# Altium PCB PCB1.PcbDoc
Units mil, origin at the board's own origin, x right, y up, seen from the top; angles counter-clockwise.
Board outline 1968.5 x 1968.5 mil, 2 copper layers (Top Layer, Bottom Layer); 28 components, 22 nets, 118 pads, 19 vias.
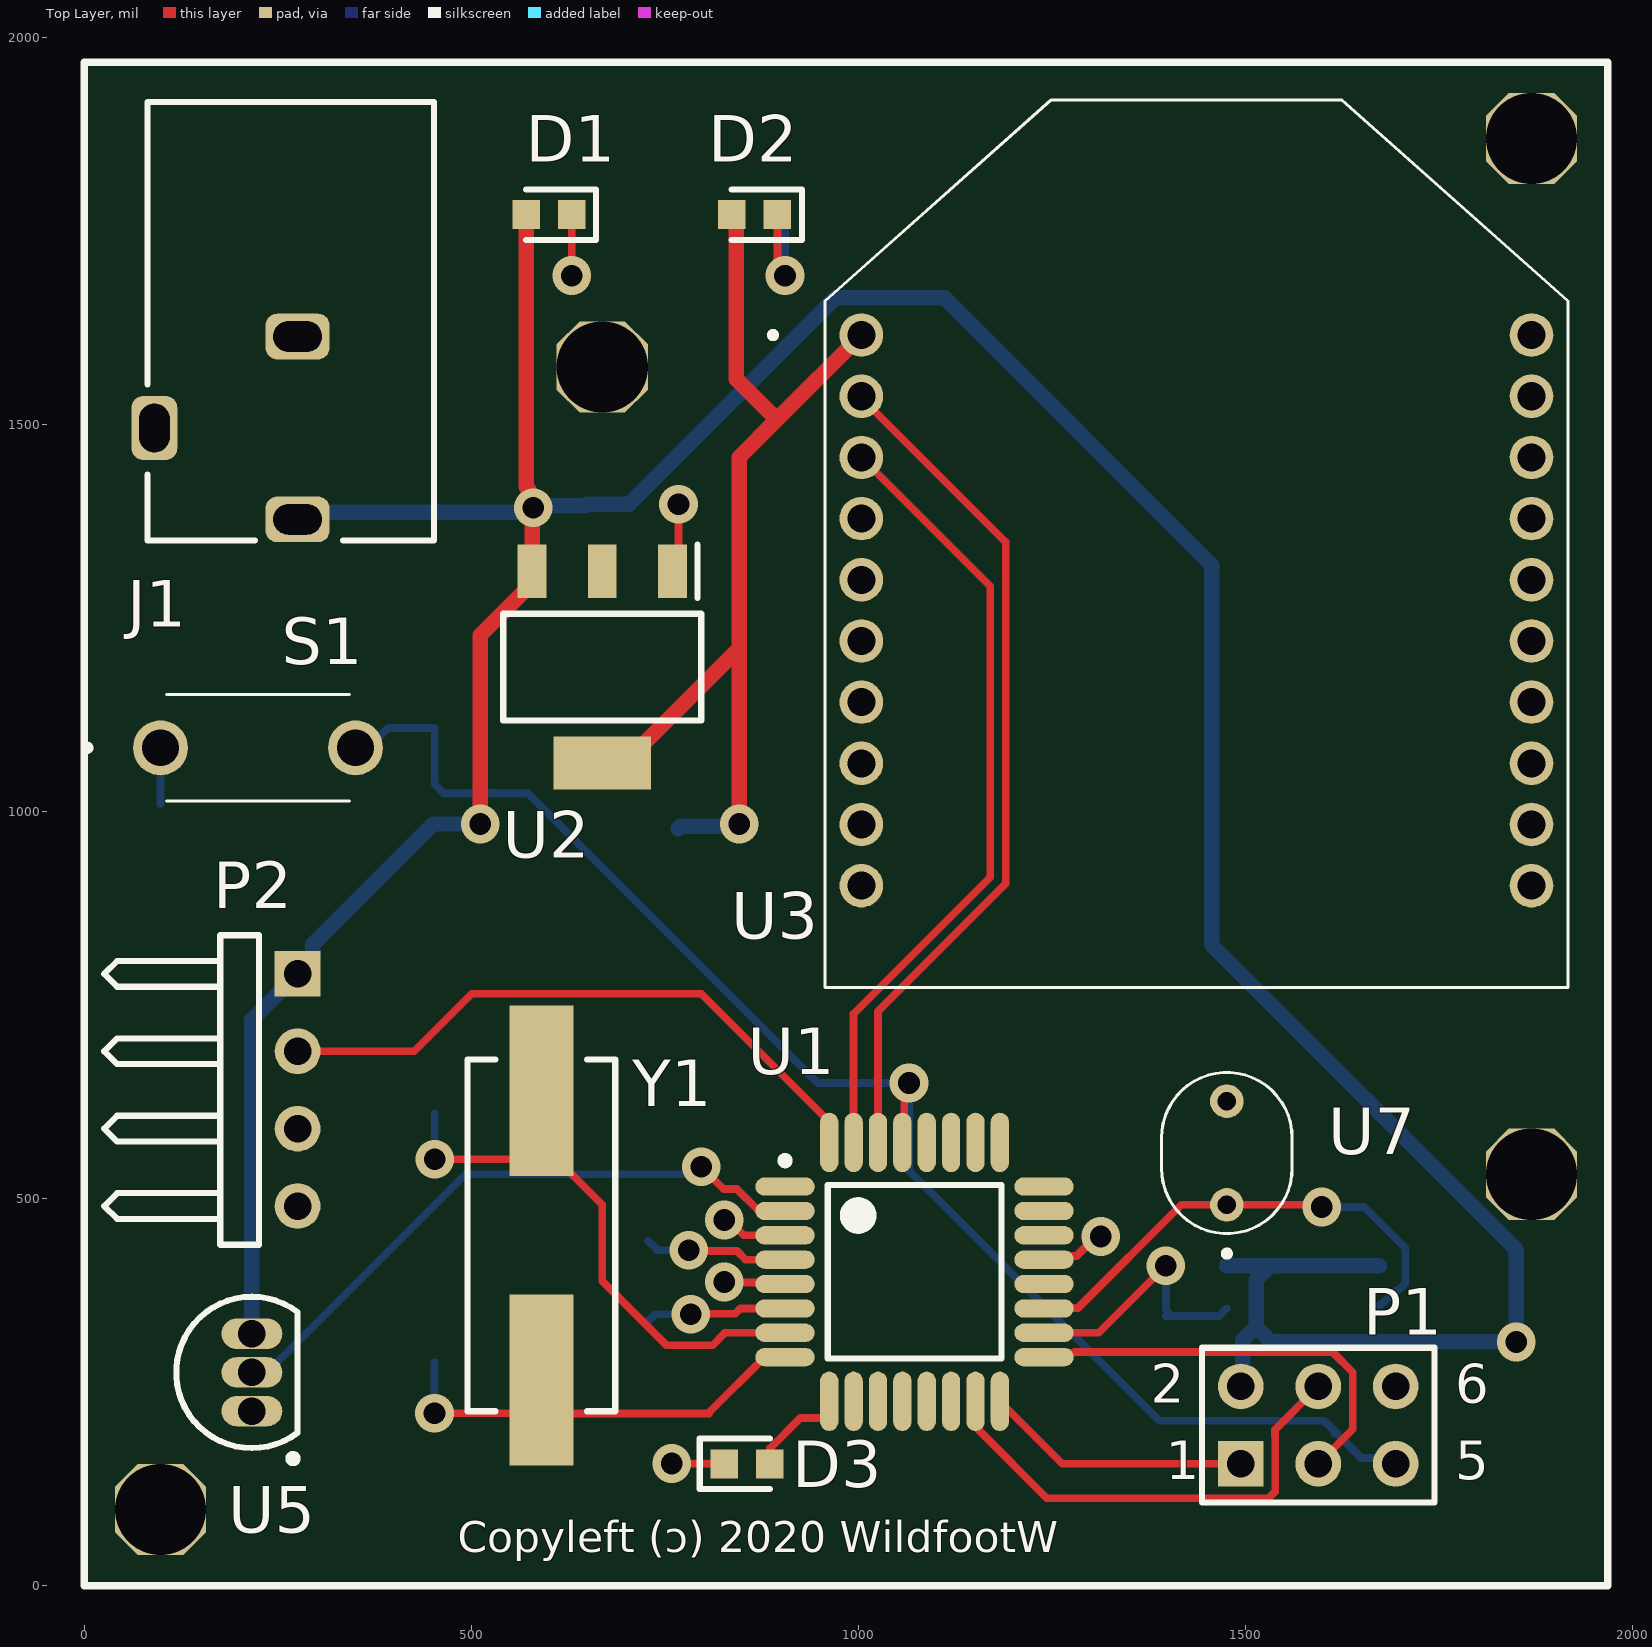
[diagram p0: Top Layer view]
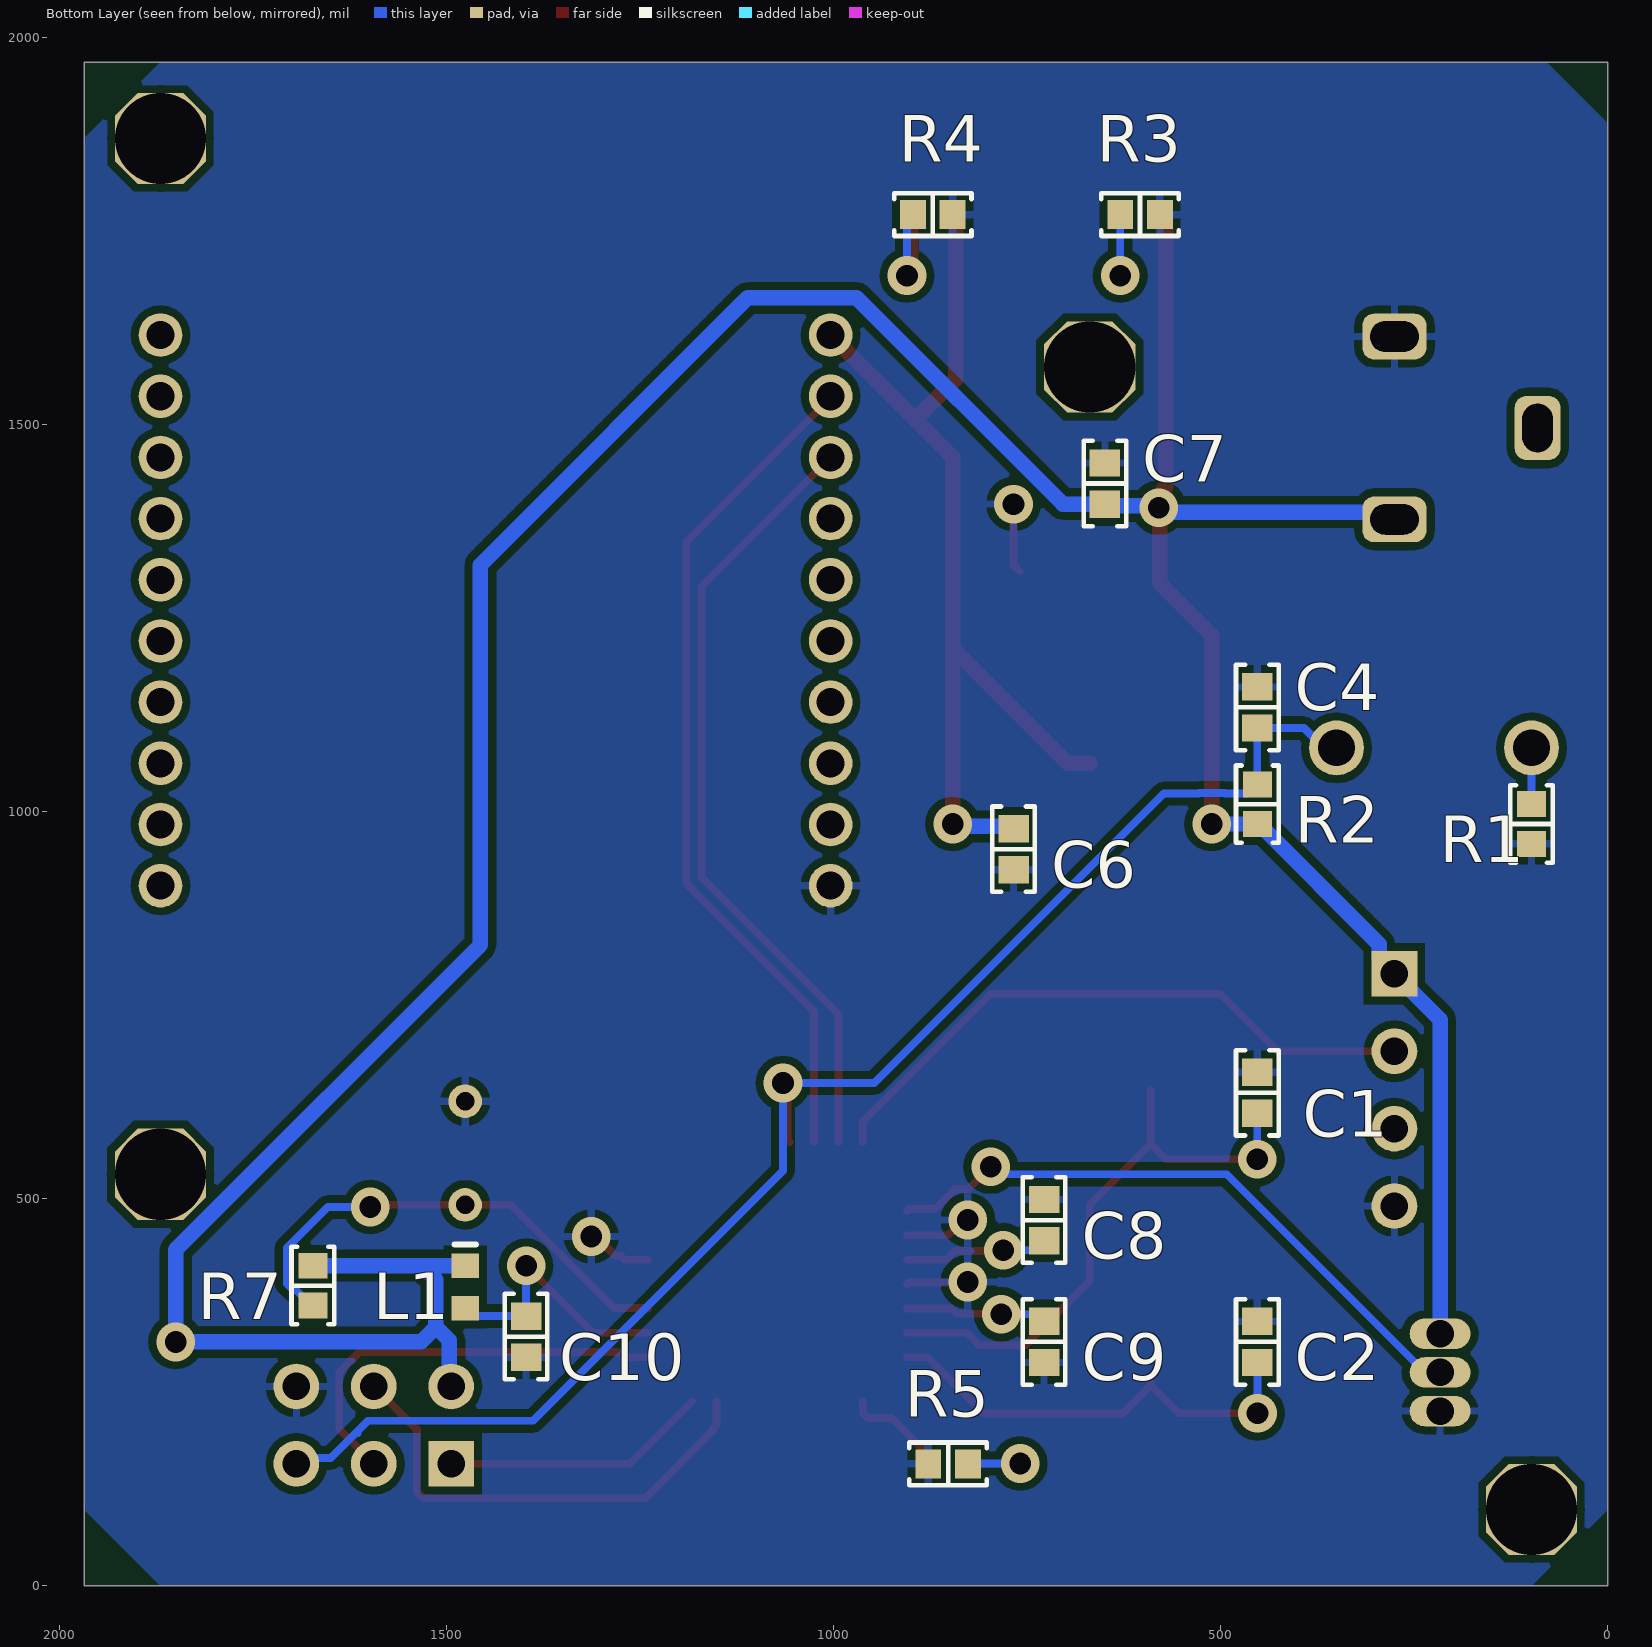
[diagram p1: Bottom Layer view, seen from below]
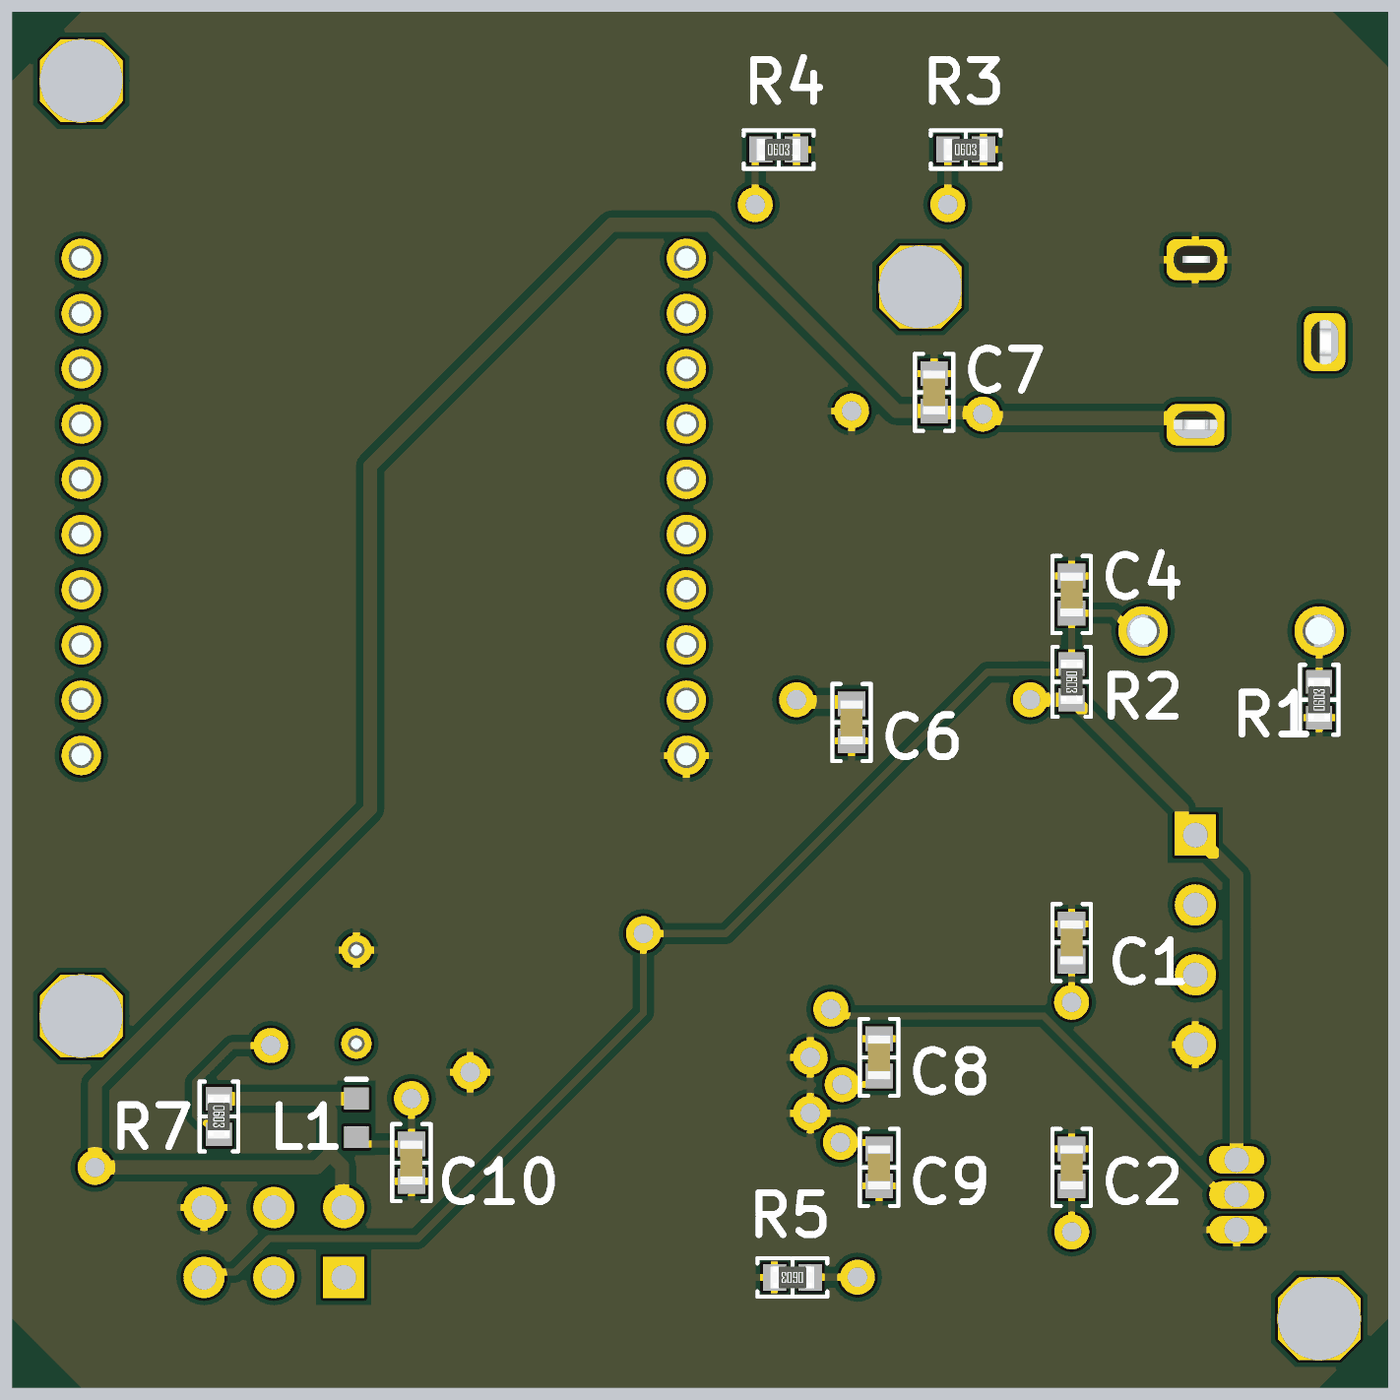
[diagram p2: 3D render of the assembled board from below, using the file's embedded part models]

## Layer stack, top to bottom
Top Solder: solder mask 0.4, Solder Resist, Dk 3.5
Top Layer: signal copper 1.4
Dielectric 1: dielectric 12.6, FR-4, Dk 4.8
Bottom Layer: signal copper 1.4
Bottom Solder: solder mask 0.4, Solder Resist, Dk 3.5

## Board outline
0,0 0,1968.5 1968.5,1968.5 1968.5,0

## Design rules (kind name [scope] priority, off if disabled: settings)
Clearance "Clearance 5V" [All] p1: gap=10 ignorepadtopadclearanceinfootprint=FALSE except(0: Arc-Hole Track-Hole SMDPad-Hole THPad-Hole Via-Hole Fill-Hole Poly-Hole Region-Hole Text-Hole; 3.94: SMDPad-SMDPad)
Clearance [All] p2: gap=10 ignorepadtopadclearanceinfootprint=FALSE except(0: Arc-Hole Track-Hole SMDPad-Hole THPad-Hole Via-Hole Fill-Hole Poly-Hole Region-Hole Text-Hole)
PolygonConnect [All] p1: connectstyle=Relief reliefconductorwidth=10 reliefentries=4 polygonreliefangle="90 Angle" airgapwidth=10
RoutingVias [All] p1: holewidth=28 width=50 viastyle="Through Hole" minholewidth=28 minwidth=50 maxholewidth=28 maxwidth=50
SolderMaskExpansion [All] p1: expansion=4 istentingtop=FALSE
Width Width_5V [InNet('VCC')] p1: maxlimit=20 minlimit=20 preferedwidth=20 minimp=50.000000 maximp=50.000000 favimp=50.000000
Width Width_3.3V [InNet('+3.3')] p2: maxlimit=20 minlimit=20 preferedwidth=20 minimp=50.000000 maximp=50.000000 favimp=50.000000
Width [All] p3: maxlimit=10 minlimit=10 preferedwidth=10
30 further rules are at their usual default settings.

## Components (designator, comment, footprint, x,y, rotation, side; value= is the part's Value field where it differs from the comment)
C1 "20pF" "CAP 0603_1608" 452.76,636.81 r90 bottom
C2 "20pF" "CAP 0603_1608" 452.76,314.96 r90 bottom
C4 "0.1µF" "CAP 0603_1608" 452.76,1134.84 r270 bottom
C6 "10µF" "CAP 0603_1608" 767.72,951.77 r90 bottom
C7 "10µF" "CAP 0603_1608" 649.61,1424.21 r270 bottom
C8 "100pF" "CAP 0603_1608" 728.35,472.44 r270 bottom
C9 "100pF" "CAP 0603_1608" 728.35,314.96 r90 bottom
C10 "0.1µF" "CAP 0603_1608" 1397.64,321.85 r90 bottom
D1 "LTST-C190GKT" LEDC1608X90N 600.39,1771.65 r180 top
D2 "LTST-C190GKT" LEDC1608X90N 866.14,1771.65 r180 top
D3 "LTST-C190GKT" LEDC1608X90N 856.3,157.48 r0 top
J1 "PJ-102AH" "CUI PJ-102AH" 275.59,1633.86 r0 top
L1 "10μH" INDC1608L 1476.38,385.83 r270 bottom
P1 "Header 3X2" HDR2X3 1494.49,157.48 r0 top
P2 "DHT22" HDR1X4H 275.59,790.55 r270 top
R1 "330 Ohms" "RES 0603_1608" 98.43,984.25 r90 bottom
R2 "4.7 kOhms" "RES 0603_1608" 452.76,1009.84 r270 bottom
R3 "500 Ohms" "RES 0603_1608" 604.33,1771.65 r180 bottom
R4 "330 Ohms" "RES 0603_1608" 872.05,1771.65 r180 bottom
R5 "500 Ohms" "RES 0603_1608" 852.36,157.48 r0 bottom
R7 "10 kOhms" "RES 0603_1608" 1673.23,387.8 r270 bottom
S1 "PTS636_SK43_LFS" PTS636SK43LFS 98.43,1082.68 r0 top
U1 "ATmega328P-AU" 32A_M 1072.83,405.51 r0 top
U2 "LM1117IMPX3.3_NOPB" SOT230P700X180-4N 669.29,1187.01 r270 top
U3 "XB24CZ7UITB003" XB24CZ7UITB003 1004.09,1616.06 r180 top
U5 "DS18B20+" Q3+1 216.54,275.59 r0 top
U7 "PDV-P8103" PDVP8103 1476.38,492.13 r180 top
Y1 "16MHz" "ABRACON ABLS" 590.55,452.76 r270 top

## Footprints (in the part's own frame and the unit in brackets; to place one, negate y for a bottom-side part, rotate by r counter-clockwise, add the part's x,y. Pads: shape width x height; smd on the part's side, far side on the other; paste and mask are expansions set on the pad)
32A_M [mm] "Thin QFP, 32-Leads, Body 7x7mm, Pitch 0.8mm, IPC Low Density"
  oval 1.95x0.6 smd: 1(-4.25,2.8) 2(-4.25,2) 3(-4.25,1.2) 4(-4.25,0.4) 5(-4.25,-0.4) 6(-4.25,-1.2) 7(-4.25,-2) 8(-4.25,-2.8) 17(4.25,-2.8) 18(4.25,-2) 19(4.25,-1.2) 20(4.25,-0.4) 21(4.25,0.4) 22(4.25,1.2) 23(4.25,2) 24(4.25,2.8)
  oval 0.6x1.95 smd: 9(-2.8,-4.25) 10(-2,-4.25) 11(-1.2,-4.25) 12(-0.4,-4.25) 13(0.4,-4.25) 14(1.2,-4.25) 15(2,-4.25) 16(2.8,-4.25) 25(2.8,4.25) 26(2,4.25) 27(1.2,4.25) 28(0.4,4.25) 29(-0.4,4.25) 30(-1.2,4.25) 31(-2,4.25) 32(-2.8,4.25)
  silkscreen extent -4.37,-2.85 2.85,3.77, body extent -3.5,-3.5 3.5,3.5, height 1.2
"ABRACON ABLS" [mm] "Crystal, 2-Leads, Body 4.70x11.40mm, Pitch 8.80mm, IPC Medium Density"
  rect 5.6x2.1 smd: 1(-4.75,0) 2(4.75,0)
  silkscreen extent -5.77,-2.42 5.77,2.42, body extent -6.35,-2.35 6.35,2.35, height 4.2
"CAP 0603_1608" [mm] "Chip Capacitor, 2-Leads, Body 1.60x0.80mm, IPC Medium Density"
  rect 0.9x1 smd: 1(-0.675,0) 2(0.675,0)
  silkscreen extent -1.4,-0.7 1.4,0.7, body extent -0.8,-0.41 0.8,0.41, height 0.82
"CUI PJ-102AH" [mm] "DC Barrel Jack W/ Switch 2.0x5.5"
  rrect50% 2.1x1.5 hole 1 slot 1.6 at 0 deg: 1(0,-6.5) 2(0,-0.5)
  rrect50% 1.5x2.1 hole 1 slot 1.6 at 90 deg: 3(-4.7,-3.5)
  silkscreen extent -4.92,-7.2 4.47,7.2, body extent -4.92,-7.2 4.47,7.2, height 11
HDR1X4H [mm] "Connector; Header; 4 Position; Right Angle"
  rect 1.5x1.5 hole 0.9: 1(0,0)
  round 1.5 hole 0.9: 2(2.54,0) 3(5.08,0) 4(7.62,0)
  silkscreen extent -1.27,-6.35 8.89,-1.27
HDR2X3 [mm] "Connector; Header; 3x2 Position"
  rect 1.5x1.5 hole 0.9: 1(0,0)
  round 1.5 hole 0.9: 2(0,2.54) 3(2.54,0) 4(2.54,2.54) 5(5.08,0) 6(5.08,2.54)
  silkscreen extent -1.27,-1.27 6.35,3.81
INDC1608L [mm] "Chip Inductor, Body 1.6x0.8mm, IPC High Density"
  rect 0.8x0.9 smd: 1(-0.7,0) 2(0.7,0)
  silkscreen extent -1.4,-0.35 -1.4,0.35, body extent -0.87,-0.48 0.87,0.48, height 0.55
LEDC1608X90N [mm]
  rect 0.9x0.95 smd: 1(-0.75,0) 2(0.75,0)
  silkscreen extent -1.55,-0.82 0.75,0.82
PDVP8103 [mm]
  round 1.1 hole 0.6: 1(0,0) 2(0,-3.4)
  silkscreen extent -2.14,-4.34 2.14,1.7, body extent -2.14,-4.35 2.14,0.94, height 2.48
PTS636SK43LFS [mm]
  round 1.8 hole 1.2: 1(0,0) 2(6.4,0)
  silkscreen extent -2.5,-1.75 6.2,1.75, body extent -0.5,-1.75 6.9,1.75, height 4.6
Q3+1 [mm] "TO, Flat Index; 3 In-Line, Axial Leads; Body Dia. 4.7mm; Leads 0.56 x 0.51 mm (max)"
  oval 2x1 hole 0.9: 1(0,-1.27) 2(0,0) 3(0,1.27)
  silkscreen extent -2.48,-2.95 1.5,2.48, body extent -2.48,-2.5 1.5,2.5, height 4.96
"RES 0603_1608" [mm] "Chip Resistor, 2-Leads, Body 1.60x0.80mm, IPC Medium Density"
  rect 0.85x0.95 smd: 1(-0.65,0) 2(0.65,0)
  silkscreen extent -1.27,-0.7 1.27,0.7, body extent -0.8,-0.4 0.8,0.4, height 0.45
SOT230P700X180-4N [mm]
  rect 1.75x0.95 smd: 1(-3.15,2.3) 2(-3.15,0) 3(-3.15,-2.3)
  rect 1.75x3.2 smd: 4(3.15,0)
  silkscreen extent -4.03,-3.25 1.75,3.25, body extent -3.5,-3.25 3.5,3.25, height 1.8
XB24CZ7UITB003 [mm]
  round 1.431 hole 0.92: 1(0,0) 2(0,2.008) 3(0,4.016) 4(0,6.024) 5(0,8.032) 6(0,10.04) 7(0,12.048) 8(0,14.056) 9(0,16.064) 10(0,18.072) 11(-21.996,18.072) 12(-21.996,16.064) 13(-21.996,14.056) 14(-21.996,12.048) 15(-21.996,10.04) 16(-21.996,8.032) 17(-21.996,6.024) 18(-21.996,4.016) 19(-21.996,2.008) 20(-21.996,0)
  silkscreen extent -23.19,-7.72 3,21.41, body extent -23.19,-7.72 1.19,21.41, height 7.97

## Part data
C1 C2: library part 06033A200JAT2A, "CAP CER 20PF 25V C0G/NP0 0603", Device Package="0603 (1608 Metric)", Manufacturer="AVX Corporation", Operating Temperature="-55°C ~ 125°C", Supplier Part Number 1=478-11802-1-ND, Temperature Coefficient="C0G, NP0", Tolerance=±5%, Voltage - Rated=25V, Applications="General Purpose", Capacitance=20pF, ComponentLink1Description=Datasheet, ComponentLink1URL=http://datasheets.avx.com/C0GNP0-Dielectric.pdf, ComponentLink2Description="DigiKey Link", ComponentLink2URL=http://digikey.com/product-detail/en/avx-corporation/06033A200JAT2A/478-11802-1-ND/8573438, LastUpdated="9/2/2020 1:03:34 AM", Lifecycle Status=Active, Minimum Order=1, Mounting Type="Surface Mount, MLCC", Package / Case="0603 (1608 Metric)", Packaging=TapeAndReel, Part Number=06033A200JAT2A, Part Status=Active, PartId=3067, Price=0.04, Series=-, Size / Dimension="0.063\" L x 0.032\" W (1.60mm x 0.81mm)", Supplier 1=DigiKey, Thickness (Max)="0.035\" (0.90mm)"
C4: library part 06033C104MAT4A, "CAP CER 0.1UF 25V X7R 0603", Device Package="0603 (1608 Metric)", Manufacturer="AVX Corporation", Operating Temperature="-55°C ~ 125°C", Supplier Part Number 1=478-12458-1-ND, Temperature Coefficient=X7R, Tolerance=±20%, Voltage - Rated=25V, Applications="General Purpose", Capacitance=0.1µF, ComponentLink1Description=Datasheet, ComponentLink1URL=http://datasheets.avx.com/X7RDielectric.pdf, ComponentLink2Description="DigiKey Link", ComponentLink2URL=http://digikey.com/product-detail/en/avx-corporation/06033C104MAT4A/478-12458-1-ND/9749310, LastUpdated="9/2/2020 1:02:57 AM", Lifecycle Status=Active, Minimum Order=1, Mounting Type="Surface Mount, MLCC", Package / Case="0603 (1608 Metric)", Packaging=TapeAndReel, Part Number=06033C104MAT4A, Part Status=Active, PartId=26210, Price=0.07, Series=-, Supplier 1=DigiKey
C6 C7: library part GRM188R60J106ME47D, "CAP CER 10UF 6.3V X5R 0603", Device Package="0603 (1608 Metric)", Manufacturer="Murata Electronics", Operating Temperature="-55°C ~ 85°C", Supplier Part Number 1=490-3896-1-ND, Temperature Coefficient=X5R, Tolerance=±20%, Voltage - Rated=6.3V, Applications="General Purpose", Capacitance=10µF, ComponentLink1Description=Datasheet, ComponentLink1URL=https://www.murata.com/~/media/webrenewal/support/library/catalog/products/capacitor/mlcc/c02e.ashx?la=en-us, ComponentLink2Description="DigiKey Link", ComponentLink2URL=http://digikey.com/product-detail/en/murata-electronics/GRM188R60J106ME47D/490-3896-1-ND/965938, LastUpdated="9/2/2020 1:03:35 AM", Lifecycle Status=Active, Minimum Order=1, Mounting Type="Surface Mount, MLCC", Package / Case="0603 (1608 Metric)", Packaging=TapeAndReel, Part Number=GRM188R60J106ME47D, Part Status=Active, PartId=2351, Price=0.03, Series=GRM, Size / Dimension="0.063\" L x 0.031\" W (1.60mm x 0.80mm)", Supplier 1=DigiKey, Thickness (Max)="0.035\" (0.90mm)"
C8 C9: library part C0603C101K5GACAUTO, "CAP CER 100PF 50V C0G/NP0 0603", Device Package="0603 (1608 Metric)", Manufacturer=KEMET, Operating Temperature="-55°C ~ 125°C", Ratings=AEC-Q200, Supplier Part Number 1=399-6843-1-ND, Temperature Coefficient="C0G, NP0", Tolerance=±10%, Voltage - Rated=50V, Applications=Automotive, Capacitance=100pF, ComponentLink1Description=Datasheet, ComponentLink1URL=https://api.kemet.com/component-edge/download/datasheet/C0603C101K5GACAUTO.pdf, ComponentLink2Description="DigiKey Link", ComponentLink2URL=http://digikey.com/product-detail/en/kemet/C0603C101K5GACAUTO/399-6843-1-ND/3314358, Features="Low ESL", LastUpdated="9/2/2020 1:03:36 AM", Lifecycle Status=Active, Minimum Order=1, Mounting Type="Surface Mount, MLCC", Package / Case="0603 (1608 Metric)", Packaging=TapeAndReel, Part Number=C0603C101K5GACAUTO, Part Status=Active, PartId=2201, Price=0.02, Series="SMD Auto C0G", Size / Dimension="0.063\" L x 0.031\" W (1.60mm x 0.80mm)", Supplier 1=DigiKey, Thickness (Max)="0.034\" (0.87mm)"
C10: library part C0603T104K8RAC7867, "CAP CER 0.1UF 10V X7R 0603", Device Package="0603 (1608 Metric)", Manufacturer=KEMET, Operating Temperature="-55°C ~ 125°C", Ratings=COTS, Supplier Part Number 1=399-20424-1-ND, Temperature Coefficient=X7R, Tolerance=±10%, Voltage - Rated=10V, Applications="High Reliability, Bypass, Decoupling", Capacitance=0.1µF, ComponentLink1Description=Datasheet, ComponentLink1URL=https://api.kemet.com/component-edge/download/datasheet/C0603T104K8RAC7867.pdf, ComponentLink2Description="DigiKey Link", ComponentLink2URL=http://digikey.com/product-detail/en/kemet/C0603T104K8RAC7867/399-20424-1-ND/9925028, LastUpdated="9/2/2020 1:03:35 AM", Lifecycle Status=Active, Minimum Order=1, Mounting Type="Surface Mount, MLCC", Package / Case="0603 (1608 Metric)", Packaging=TapeAndReel, Part Number=C0603T104K8RAC7867, Part Status=Active, PartId=2528, Price=0.23, Series="SMD COTS X7R", Size / Dimension="0.063\" L x 0.031\" W (1.60mm x 0.80mm)", Supplier 1=DigiKey, Thickness (Max)="0.034\" (0.87mm)"
D1 D2 D3: "LED", Manufacturer_Name=Lite-On, Mouser Part Number=859-LTST-C190GKT, Arrow Part Number=LTST-C190GKT, Arrow Price/Stock=https://www.arrow.com/en/products/ltst-c190gkt/lite-on-technology, Datasheet Link=https://media.digikey.com/pdf/Data%20Sheets/Lite-On%20PDFs/LTST-C190GKT.pdf, Height=0.9mm, Manufacturer_Part_Number=LTST-C190GKT, Mouser Price/Stock=https://www.mouser.co.uk/ProductDetail/Lite-On/LTST-C190GKT?qs=drxkyCeiWgbQzclgbojDOg%3D%3D
J1: "CONN PWR JACK 2X5.5MM SOLDER", Current Rating (Amps)=5A, Manufacturer="CUI Devices", Material Flammability Rating="UL94 V-0", Supplier Part Number 1=CP-102AH-ND, Voltage - Rated=24VDC, Actual Diameter="0.079\" (2.00mm ID), 0.256\" (6.50mm OD)", ComponentLink1Description=Datasheet, ComponentLink1URL=https://www.cuidevices.com/product/resource/digikeypdf/pj-102ah.pdf, ComponentLink2Description="DigiKey Link", ComponentLink2URL=//digikey.com/product-detail/en/cui-devices/PJ-102AH/CP-102AH-ND/408448, Connector Type=Jack, Gender=Male, Industry Recognized Mating Diameter="2.00mm ID (0.079\"), 5.50mm OD (0.217\")", Internal Switch(s)="Single Switch, Normally Closed", LastUpdated="12/16/2019 7:01:27 PM", Lifecycle Status=0, Mating Length/Depth="0.354\" (9.00mm)", Minimum Order=1, Mounting Type="Through Hole, Right Angle", Number of Positions/Contacts="2 Conductors, 3 Contacts", Packaging=Tray, Part Number=PJ-102AH, Part Status=Active, Price=0.76, Series=-, Shielding=Unshielded, Supplier 1=DigiKey, Termination=Solder
L1: library part Inductor, "Inductor", Code_IEC=1005, Code_JEITA=0402, LatestRevisionDate=29-May-2009, LatestRevisionNote="IPC-7351 Footprint Added.", PackageDescription="Chip Inductor", PackageReference=0402-A, Published=8-Jun-2000, Publisher="Altium Limited"
P1: "Header, 3-Pin, Dual row", LatestRevisionDate=17-Jul-2002, LatestRevisionNote="Re-released for DXP Platform.", Publisher="Altium Limited"
P2: library part "Header 4H", "Header, 4-Pin, Right Angle", LatestRevisionDate=17-Jul-2002, LatestRevisionNote="Re-released for DXP Platform.", Publisher="Altium Limited"
R1 R4: library part CRGP0603F330R, "CRGP 0603 330R 1%", Device Package="0603 (1608 Metric)", Manufacturer="TE Connectivity Passive Product", Operating Temperature="-55°C ~ 155°C", Power (Watts)="0.25W, 1/4W", Supplier Device Package=0603, Supplier Part Number 1=A130410CT-ND, Temperature Coefficient=±100ppm/°C, Tolerance=±1%, ComponentLink1Description=Datasheet, ComponentLink1URL=https://www.te.com/commerce/DocumentDelivery/DDEController?Action=srchrtrv&DocNm=9-1773463-9&DocType=DS&DocLang=English, ComponentLink2Description="DigiKey Link", ComponentLink2URL=http://digikey.com/product-detail/en/te-connectivity-passive-product/CRGP0603F330R/A130410CT-ND/8578242, Composition="Thick Film", Features="Pulse Withstanding", Height - Seated (Max)="0.022\" (0.55mm)", LastUpdated="9/2/2020 1:09:50 AM", Lifecycle Status=Active, Minimum Order=1, Number of Terminations=2, Package / Case="0603 (1608 Metric)", Packaging=TapeAndReel, Part Number=CRGP0603F330R, Part Status=Active, PartId=20927, Price=0.02, Resistance="330 Ohms", Series=CRGP, Size / Dimension="0.063\" L x 0.031\" W (1.60mm x 0.80mm)", Supplier 1=DigiKey
R2: library part ERA-3AEB472V, "RES SMD 4.7K OHM 0.1% 1/10W 0603", Device Package="0603 (1608 Metric)", Manufacturer="Panasonic Electronic Components", Operating Temperature="-55°C ~ 155°C", Power (Watts)="0.1W, 1/10W", Ratings=AEC-Q200, Supplier Device Package=0603, Supplier Part Number 1=P4.7KDBCT-ND, Temperature Coefficient=±25ppm/°C, Tolerance=±0.1%, ComponentLink1Description=Datasheet, ComponentLink1URL=https://industrial.panasonic.com/cdbs/www-data/pdf/RDM0000/AOA0000C307.pdf, ComponentLink2Description="DigiKey Link", ComponentLink2URL=http://digikey.com/product-detail/en/panasonic-electronic-components/ERA-3AEB472V/P4.7KDBCT-ND/1466068, Composition="Thin Film", Features="Automotive AEC-Q200", Height - Seated (Max)="0.022\" (0.55mm)", LastUpdated="9/2/2020 1:10:23 AM", Lifecycle Status=Active, Minimum Order=1, Number of Terminations=2, Package / Case="0603 (1608 Metric)", Packaging=TapeAndReel, Part Number=ERA-3AEB472V, Part Status=Active, PartId=5519, Price=0.04, Resistance="4.7 kOhms", Series=ERA-3A, Size / Dimension="0.063\" L x 0.031\" W (1.60mm x 0.80mm)", Supplier 1=DigiKey
R3 R5: library part TNPU0603500RAZEN00, "RES SMD 500 OHM 0.05% 1/10W 0603", Device Package="0603 (1608 Metric)", Manufacturer="Vishay Dale", Operating Temperature="-55°C ~ 125°C", Power (Watts)="0.1W, 1/10W", Ratings=AEC-Q200, Supplier Device Package=0603, Supplier Part Number 1=541-3301-1-ND, Temperature Coefficient=±5ppm/°C, Tolerance=±0.05%, ComponentLink1Description=Datasheet, ComponentLink1URL=http://www.vishay.com/docs/28779/tnpue3.pdf, ComponentLink2Description="DigiKey Link", ComponentLink2URL=http://digikey.com/product-detail/en/vishay-dale/TNPU0603500RAZEN00/541-3301-1-ND/6615958, Composition="Thin Film", Features="Anti-Sulfur, Automotive AEC-Q200, Moisture Resistant", Height - Seated (Max)="0.022\" (0.55mm)", LastUpdated="9/2/2020 1:10:10 AM", Lifecycle Status=Active, Minimum Order=1, Number of Terminations=2, Package / Case="0603 (1608 Metric)", Packaging=TapeAndReel, Part Number=TNPU0603500RAZEN00, Part Status=Active, PartId=11840, Price=1.20, Resistance="500 Ohms", Series=TNPU, Size / Dimension="0.063\" L x 0.033\" W (1.60mm x 0.85mm)", Supplier 1=DigiKey
R7: library part CPF0603B10KE, "RES SMD 10K OHM 0.1% 1/16W 0603", Device Package="0603 (1608 Metric)", Manufacturer="TE Connectivity Passive Product", Operating Temperature="-55°C ~ 155°C", Power (Watts)="0.063W, 1/16W", Supplier Device Package=0603, Supplier Part Number 1=A119886CT-ND, Temperature Coefficient=±25ppm/°C, Tolerance=±0.1%, ComponentLink1Description=Datasheet, ComponentLink1URL=https://www.te.com/commerce/DocumentDelivery/DDEController?Action=srchrtrv&DocNm=1773200&DocType=DS&DocLang=English, ComponentLink2Description="DigiKey Link", ComponentLink2URL=http://digikey.com/product-detail/en/te-connectivity-passive-product/CPF0603B10KE/A119886CT-ND/4966484, Composition="Thin Film", Height - Seated (Max)="0.022\" (0.55mm)", LastUpdated="9/2/2020 1:10:25 AM", Lifecycle Status=Active, Minimum Order=1, Number of Terminations=2, Package / Case="0603 (1608 Metric)", Packaging=TapeAndReel, Part Number=CPF0603B10KE, Part Status=Active, PartId=4872, Price=0.09, Resistance="10 kOhms", Series="CPF, Neohm", Size / Dimension="0.061\" L x 0.031\" W (1.55mm x 0.80mm)", Supplier 1=DigiKey
S1: "Switch", Arrow Part Number="PTS636 SK43 LFS", Manufacturer_Name="C & K COMPONENTS", Mouser Part Number=611-PTS636SK43LFS, Arrow Price/Stock=https://www.arrow.com/en/products/pts636-sk43-lfs/ck, Datasheet Link="https://componentsearchengine.com/Datasheets/1/PTS636 SK43 LFS.pdf", Height=4.5mm, Manufacturer_Part_Number="PTS636 SK43 LFS", Mouser Price/Stock=https://www.mouser.co.uk/ProductDetail/CK/PTS636-SK43-LFS?qs=vLWxofP3U2yMiQldG7jfnQ%3D%3D
U1: library part CMP-0095-00269-2, "8-bit AVR Microcontroller, 32KB Flash, 1KB EEPROM, 2KB SRAM, 32-pin TQFP, Industrial Grade (-40°C to 85°C)", Code_JEDEC=MS-026-ABA, ComponentLink1Description="Manufacturer URL", ComponentLink1URL=http://www.atmel.com/, ComponentLink2Description="ATmega48A/48PA/88A/88PA/168A/168PA/328/328P Datasheet", ComponentLink2URL=http://www.atmel.com/dyn/resources/prod_documents/doc8271.pdf, ComponentLink3Description="ATmega48A/48PA/88A/88PA/168A/168PA/328/328P Summary", ComponentLink3URL=http://www.atmel.com/dyn/resources/prod_documents/8271S.pdf, DatasheetVersion="revD, May-2011", PackageDescription="32-Lead, 7x7x1.0 mm Body, 0.8mm Lead Pitch, Thin Profile Plastic Quad Flat Package (TQFP)", PackageReference=32A, PackageVersion="revC, Oct-2010", RevisionNote="DatasheetVersion & PackageVersion updated. URLs added."
U2: "Integrated Circuit", Manufacturer_Name="Texas Instruments", Manufacturer_Part_Number=LM1117IMPX3.3/NOPB, Datasheet Link=http://www.ti.com/lit/ds/symlink/lm1117.pdf, Height=1.8mm
U3: "Integrated Circuit", Manufacturer_Name="Digi International", Mouser Part Number=888-XB24CZ7UITB003, Arrow Part Number=XB24CZ7UITB003, Arrow Price/Stock=https://www.arrow.com/en/products/xb24cz7uitb003/digi-international, Datasheet Link=https://www.digi.com/resources/documentation/digidocs/pdfs/90001500.pdf, Height=7.874mm, Manufacturer_Part_Number=XB24CZ7UITB003, Mouser Price/Stock=https://www.mouser.com/Search/Refine.aspx?Keyword=888-XB24CZ7UITB003
U5: library part CMP-0253-00003-1, "Programmable Resolution Digital Thermometer, 1-Wire Interface, ±0.5°C Accuracy, 3-Pin TO92, -55°C to +125°C, Pb-Free", Code_JEDEC=TO-226-AA, ComponentLink1Description="Manufacturer URL", ComponentLink1URL=http://www.maxim-ic.com, ComponentLink2Description=Datasheet, ComponentLink2URL=http://datasheets.maxim-ic.com/en/ds/DS18B20.pdf, DatasheetVersion=2007, PackageDescription="TO-92 Package, Body Dia. 4.7mm; Leads 0.51 x 0.51 mm (max), Pb-Free", PackageReference=Q3+1, PackageVersion="revB, 2009"
U7: "Integrated Circuit", Manufacturer_Name="Luna Optoelectronics", Datasheet Link=https://datasheet.datasheetarchive.com/originals/dk/DKDS-5/85880.pdf, Height=2.38mm, Manufacturer_Part_Number=PDV-P8103
Y1: library part ABLS-16.000MHZ-B2-T, "CRYSTAL 16.0000MHZ 18PF SMD", ESR (Equivalent Series Resistance)="40 Ohms", Frequency Stability=±50ppm, Frequency Tolerance=±20ppm, Load Capacitance=18pF, Manufacturer="Abracon LLC", Operating Mode=Fundamental, Operating Temperature="-20°C ~ 70°C", Package / Case=HC-49/US, Supplier Part Number 1=535-9071-1-ND, ComponentLink1Description=Datasheet, ComponentLink1URL=https://abracon.com/Resonators/abls.pdf, ComponentLink2Description="DigiKey Link", ComponentLink2URL=http://digikey.com/product-detail/en/abracon-llc/ABLS-16.000MHZ-B2-T/535-9071-1-ND/675588, Frequency=16MHz, Height - Seated (Max)="0.165\" (4.20mm)", LastUpdated="9/2/2020 1:21:45 AM", Lifecycle Status=Active, Minimum Order=1, Mounting Type="Surface Mount", Packaging=TapeAndReel, Part Number=ABLS-16.000MHZ-B2-T, Part Status=Active, PartId=132, Price=0.24, Series=ABLS, Size / Dimension="0.449\" L x 0.185\" W (11.40mm x 4.70mm)", Supplier 1=DigiKey, Type="MHz Crystal"

## Free pads (board coordinates)
  oct 118.11x118.11 hole 118.11: 1(1870.08,1870.08) 2(1870.08,531.5) 3(98.43,98.43) 4(669.29,1574.8)

## Via types
v1: diameter 50, hole 28, Top Layer to Bottom Layer, 19 vias

## Nets (pads, with @x,y where several pads share a name; then routed paths per layer and width w, separated by ;. In a path a pad name is that pad's centre, name@x,y a point inside that pad or via, vN(x,y) a via of type N, cw(c..) or ccw(c..) an arc to the next point about the centre after c; other vN are vias at no path point)
+3.3: C6.2 D2.2 U2.4 U3.1 | length 1299.7
  Top Layer w20: U2.4 697.83,1062.99 846.46,1211.61 ; D2.2@842.6,1767.8 842.6,1558.98 894.8,1506.77 ; v1(846.46,984.25) 846.46,1211.61 ; U3.1 894.8,1506.77 ; 846.46,1211.61 846.46,1458.43 894.8,1506.77
  Bottom Layer w20: C6.2 770.67,981.3 843.5,981.3 v1(846.46,984.25)
GND: C1.2 C2.2 C4.1 C6.1 C7.1 C8.1 C9.1 C10.1 J1.2 P1.6 P2.4 R1.1 R3.2 R4.2 R5.2 U1.3 U1.5 U1.21 U2.1 U3.10 U5.1 U7.2 | length 342.3
  Top Layer w10: U2.1 767.72,1318.9 v1(767.72,1397.64) ; v1(826.77,392.44) 828.03,392.44 828.74,391.73 903.54,391.73 U1.5 ; v1(826.77,472.44) 832.44,472.44 852.13,452.76 U1.3 ; U1.21 1270.42,421.26 1275.1,425.94 1282.12,425.94 1307.31,451.13 v1(1313.51,451.13)
NetC1_1: C1.1 U1.7 Y1.1 | length 761
  Top Layer w10: v1(452.76,551.18) 570.87,551.18 Y1.1@590.55,570.87 ; Y1.1 Y1.1@590.55,570.87 ; U1.7 827.95,326.77 811.84,310.66 752.33,310.66 669.29,393.7 669.29,492.13 Y1.1@590.55,570.87
  Bottom Layer w10: v1(452.76,551.18) C1.1
NetC2_1: C2.1 U1.8 Y1.2 | length 586.4
  Top Layer w10: v1(452.55,222.68) 554.21,222.68 590.55,259.02 Y1.2 ; Y1.2@590.55,258.73 626.89,222.39 807.09,222.39 807.09,223.43 878.94,295.28 U1.8
  Bottom Layer w10: v1(452.55,222.68) 452.55,288.18 C2.1
NetC4_2: C4.2 P1.5 R2.1 S1.2 U1.29 | length 1941.2
  Top Layer w10: U1.29 1059.69,575.44 1059.69,643.71 v1(1065.59,649.61)
  Bottom Layer w10: S1.2 366.86,1082.68 392.45,1108.27 C4.2 R2.1 464.49,1023.7 494.69,1023.7 495.24,1024.25 528.38,1024.25 528.93,1023.7 573.56,1023.7 947.66,649.61 v1(1065.59,649.61) 1065.59,536.07 1388.71,212.95 1601.99,212.95 1618.09,196.85 ; 1615.29,196.85 1618.09,196.85 ; P1.5 1686.99,164.98 1649.96,164.98 1618.09,196.85
NetC8_2: C8.2 U1.4 | length 187.4
  Top Layer w10: v1(781.19,433.43) 782.17,432.44 843.34,432.44 854.52,421.26 U1.4
  Bottom Layer w10: C8.2 740.79,433.43 v1(781.19,433.43)
NetC9_2: C9.2 U1.6 | length 184.1
  Top Layer w10: v1(783.71,350.66) 784.33,351.27 840.91,351.27 847.91,358.27 U1.6
  Bottom Layer w10: C9.2 737.47,350.66 v1(783.71,350.66)
NetC10_2: C10.2 L1.2 U1.18 | length 344.3
  Top Layer w10: U1.18 1311.02,326.77 v1(1397.64,413.39)
  Bottom Layer w10: v1(1397.64,413.39) 1397.64,356.02 1401.43,352.22 C10.2 1466.54,348.43 L1.2
NetD1_1: D1.1 R3.1 | length 157.5
  Top Layer w10: v1(629.92,1692.91) D1.1
  Bottom Layer w10: v1(629.92,1692.91) R3.1
NetD2_1: D2.1 R4.1 | length 178.7
  Top Layer w10: v1(905.51,1692.91) 895.67,1702.76 D2.1 D2.1@905.51,1761.81
  Bottom Layer w10: R4.1 905.51,1763.78 v1(905.51,1692.91)
NetD3_1: D3.1 R5.1 | length 135.3
  Top Layer w10: v1(759.25,157.79) 759.56,157.48 D3.1
  Bottom Layer w10: v1(759.25,157.79) 826.46,157.79 R5.1
NetD3_2: D3.2 U1.9 | length 130.7
  Top Layer w10: D3.2 885.83,177.17 925.28,216.61 956.31,216.61 962.6,222.91 U1.9
NetP1_1: P1.1 U1.16 | length 344.8
  Top Layer w10: U1.16 1263.78,157.48 P1.1
NetP1_3: P1.3 U1.17 | length 549.3
  Top Layer w10: U1.17 1270.42,295.28 1276.16,301.02 1278.9,301.02 1279.88,302.01 1612.93,302.01 1639.02,275.92 1639.02,202.01 P1.3
NetP1_4: P1.4 U1.15 | length 621.2
  Top Layer w10: U1.15 1151.57,207.93 1156.26,203.24 1156.26,200.51 1243.82,112.95 1530.23,112.95 1539.02,121.74 1539.02,193.22 1538.76,193.47 1538.76,201.76 P1.4
NetP2_2: P2.2 U1.32 | length 813
  Top Layer w10: P2.2 426.26,690.55 500.71,765 797.01,765 962.6,599.41 U1.32
NetR1_2: R1.2 S1.1 | length 72.8
  Bottom Layer w10: R1.2 S1.1
NetR7_2: R7.2 U1.19 U7.1 | length 636.6
  Top Layer w10: U1.19 1240.75,358.86 1284.06,358.86 1417.32,492.13 U7.1 1596.14,492.13 v1(1598.92,489.34)
  Bottom Layer w10: v1(1598.92,489.34) 1653.92,489.34 1706.93,436.33 1706.93,390.44 1698.14,381.65 1694.65,381.65 1675.2,362.2 R7.2
NetU1_2: U1.2 U5.2 | length 822.8
  Top Layer w10: v1(797.36,541.46) 826.38,512.44 843.34,512.44 868.92,486.86 902.91,486.86 U1.2
  Bottom Layer w10: U5.2 236.22,275.59 492.36,531.73 787.64,531.73 v1(797.36,541.46)
NetU1_30: U1.30 U3.2 | length 1110
  Top Layer w10: U3.2 1004.09,1535.28 1190.81,1348.56 1190.81,907.33 1025.59,742.11 U1.30
NetU1_31: U1.31 U3.3 | length 1027.4
  Top Layer w10: U1.31 994.09,738.89 1170.81,915.61 1170.81,1291.24 U3.3
VCC: C7.2 D1.2 J1.1 L1.1 P1.2 P2.1 R2.2 R7.1 U2.3 U5.3 | length 4943
  Top Layer w20: U5.3 U5.3@220.24,321.88 ; v1(511.81,984.25) 511.81,1228.35 578.74,1295.28 U2.3 578.74,1402.45 574.26,1406.93 574.26,1416.4 570.87,1419.79 570.87,1751.97
  Bottom Layer w20: U5.3 216.54,731.5 P2.1 295.12,810.08 295.12,828.58 450.79,984.25 R2.2 v1(511.81,984.25) ; J1.1 284.97,1387.33 574.26,1387.33 v1(580,1393.07) 582.28,1395.36 647.32,1395.36 C7.2 704.08,1397.64 970.67,1664.23 1111.36,1664.23 1456.69,1318.9 1456.69,828.01 1850.39,434.31 v1(1850.39,314.96) 1533.37,314.96 1514.09,334.24 ; L1.1 1532.13,413.39 ; P1.2 1496.87,259.86 1496.87,317.01 1514.09,334.24 ; R7.1 1532.13,413.39 ; 1514.09,334.24 1514.09,395.35 1532.13,413.39
pads on no net: J1.3 P2.3 U1.1 U1.10 U1.11 U1.12 U1.13 U1.14 U1.20 U1.22 U1.23 U1.24 U1.25 U1.26 U1.27 U1.28 U2.2 U3.4 U3.5 U3.6 U3.7 U3.8 U3.9 U3.11 U3.12 U3.13 U3.14 U3.15 U3.16 U3.17 U3.18 U3.19 U3.20

## Polygon pours and split planes (outlines as drawn)
GND on Bottom Layer "Bottom Ground" (solid, pour order 0): 0,98.43 98.43,0 1870.08,0 1968.5,98.43 1968.5,1870.08 1870.08,1968.5 78.74,1968.5 0,1889.76

## Silkscreen, mask and mechanical layers (free items; w line width, h text height)
Top Overlay:
  the board outline again, w10
  text "Copyleft (ɔ) 2020 WildfootW" at 482.44,43.01 h40

## Text inside footprints (layer, text, board x,y; h text height)
P1: Top Overlay "1" at 1397.64,137.8 h50; Top Overlay "2" at 1377.95,236.22 h50; Top Overlay "5" at 1771.65,137.8 h50; Top Overlay "6" at 1771.65,236.22 h50